# Altium PCB Copy of remote_control_light.PcbDoc
Units mm, origin at the board's own origin, x right, y up, seen from the top; angles counter-clockwise.
Board outline 49.78 x 85.09 mm, 2 copper layers (Top Layer, Bottom Layer); 21 components, 12 nets, 88 pads, 0 vias.
Unrouted connection lines stored in the file: 50.
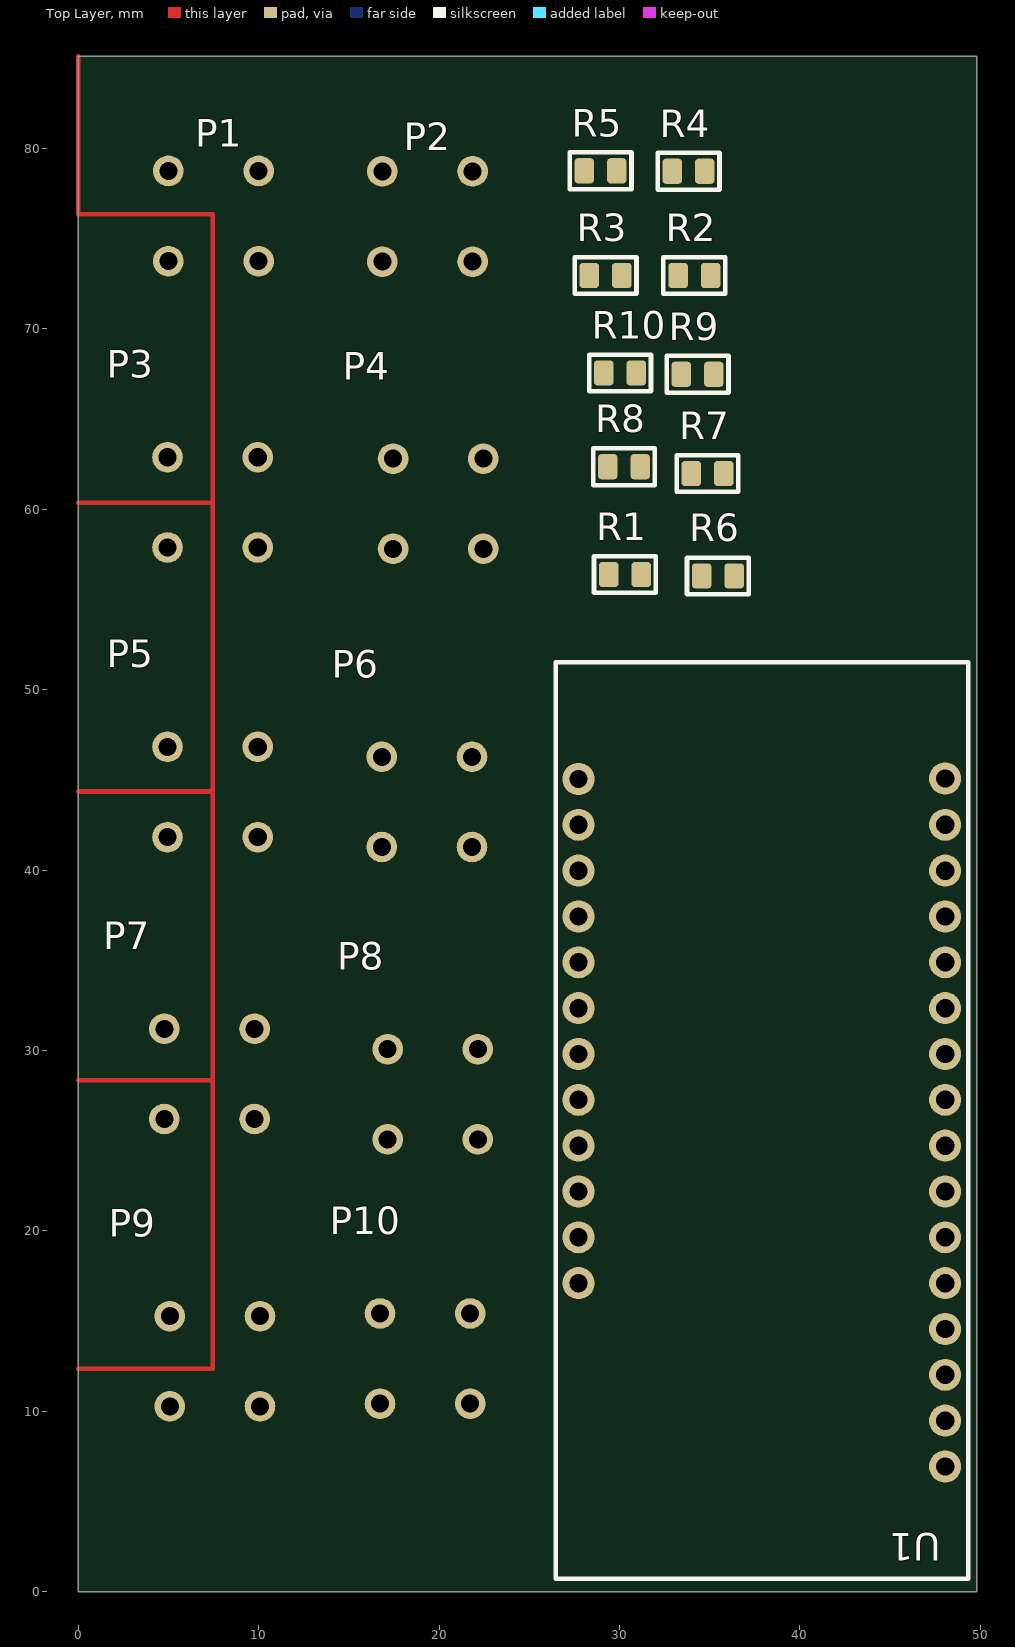
[diagram p0: Top Layer view]
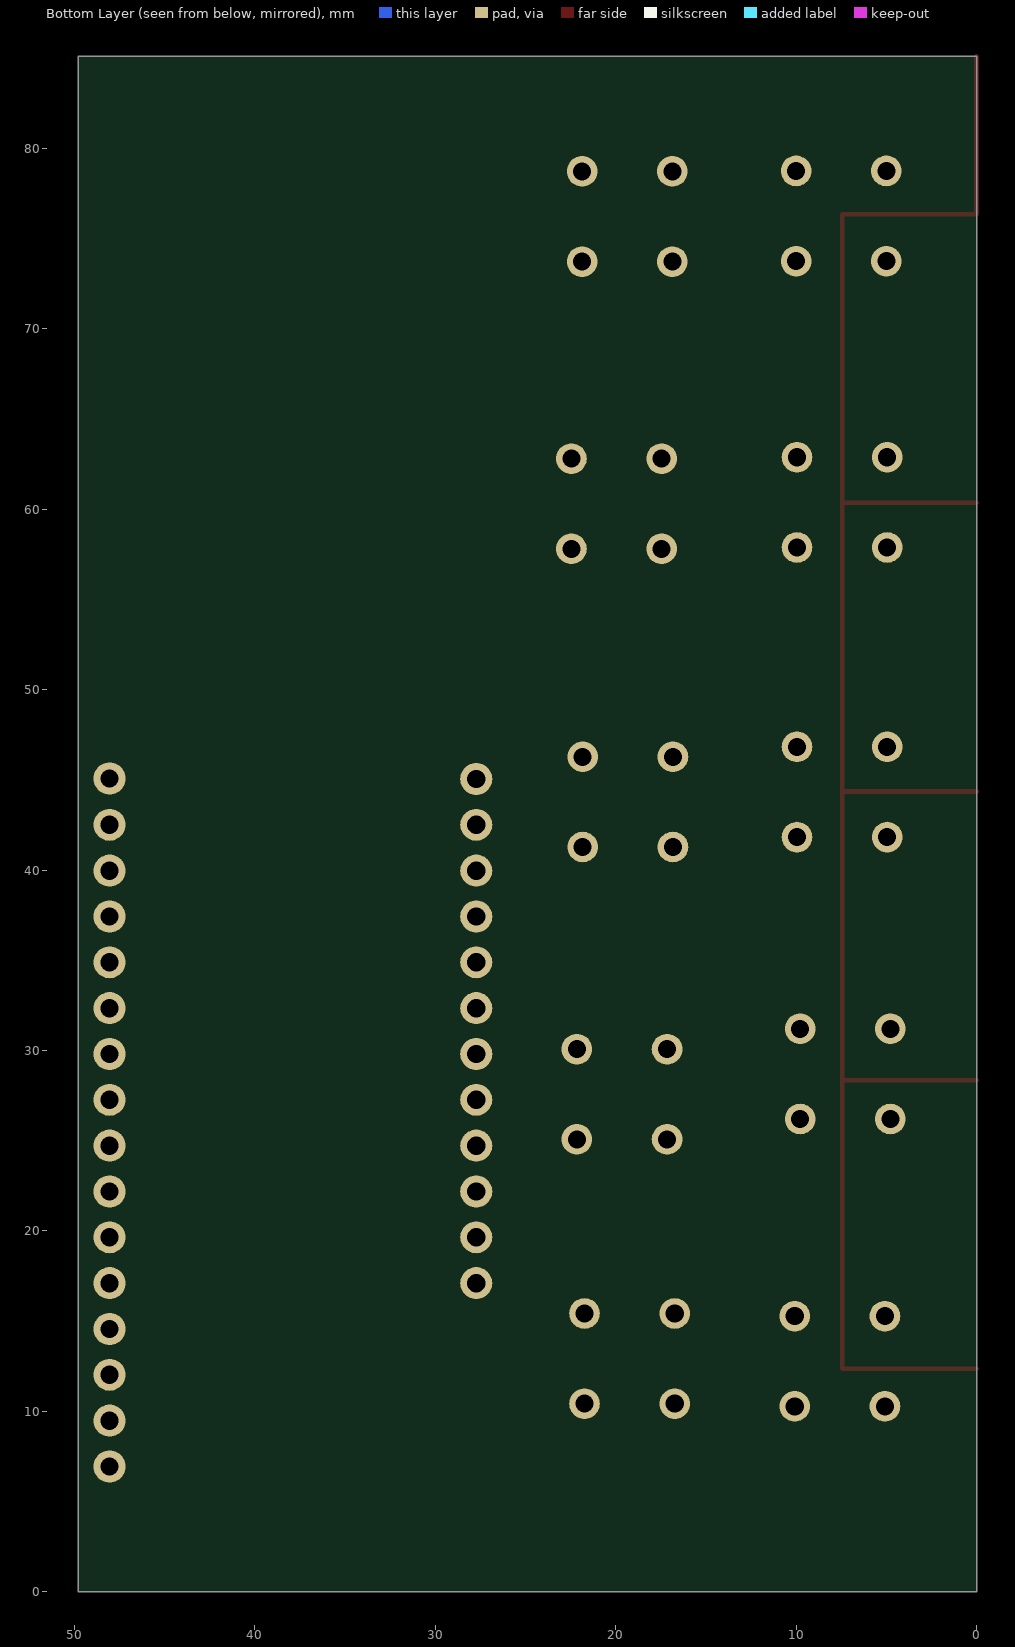
[diagram p1: Bottom Layer view, seen from below]

## Layer stack, top to bottom
Top Solder: solder mask 0.0102, Solder Resist, Dk 3.5
Top Layer: signal copper 0.0356
Dielectric 1: dielectric 0.32, FR-4, Dk 4.8
Bottom Layer: signal copper 0.0356
Bottom Solder: solder mask 0.0102, Solder Resist, Dk 3.5

## Board outline
0,0 0,85.09 49.784,85.09 49.784,0

## Design rules (kind name [scope] priority, off if disabled: settings)
Clearance [All] p1: gap=0.254 ignorepadtopadclearanceinfootprint=FALSE except(0: Arc-Hole Track-Hole SMDPad-Hole THPad-Hole Via-Hole Fill-Hole Poly-Hole Region-Hole Text-Hole)
PolygonConnect [All] p1: connectstyle=Relief reliefconductorwidth=0.254 reliefentries=4 polygonreliefangle="90 Angle" airgapwidth=0.254
RoutingVias [All] p1: holewidth=0.711 width=1.27 viastyle="Through Hole" minholewidth=0.711 minwidth=1.27 maxholewidth=0.711 maxwidth=1.27
SolderMaskExpansion [All] p1: expansion=0.102
Width [All] p1: maxlimit=0.254 minlimit=0.254 preferedwidth=0.254
30 further rules are at their usual default settings.

## Components (designator, comment, footprint, x,y, rotation, side; value= is the part's Value field where it differs from the comment)
P1 "PUSH_BUTTON_D6F" PUSH_BUTTON_D6F 9.999,73.741 r180 top
P2 "PUSH_BUTTON_D6F" PUSH_BUTTON_D6F 16.856,78.716 r0 top
P3 "PUSH_BUTTON_D6F" PUSH_BUTTON_D6F 9.95,57.875 r180 top
P4 "PUSH_BUTTON_D6F" PUSH_BUTTON_D6F 17.45,62.8 r0 top
P5 "PUSH_BUTTON_D6F" PUSH_BUTTON_D6F 9.95,41.825 r180 top
P6 "PUSH_BUTTON_D6F" PUSH_BUTTON_D6F 16.825,46.275 r0 top
P7 "PUSH_BUTTON_D6F" PUSH_BUTTON_D6F 9.775,26.2 r180 top
P8 "PUSH_BUTTON_D6F" PUSH_BUTTON_D6F 17.15,30.075 r0 top
P9 "PUSH_BUTTON_D6F" PUSH_BUTTON_D6F 10.075,10.275 r180 top
P10 "PUSH_BUTTON_D6F" PUSH_BUTTON_D6F 16.725,15.425 r0 top
R1 "RES - 0805" RES_0805 30.3,56.375 r0 top value=1k
R2 "RES - 0805" RES_0805 34.148,72.95 r180 top value=1k
R3 "RES - 0805" RES_0805 29.225,72.95 r0 top value=1k
R4 "RES - 0805" RES_0805 33.825,78.725 r180 top value=1k
R5 "RES - 0805" RES_0805 28.95,78.75 r0 top value=1k
R6 "RES - 0805" RES_0805 35.452,56.3 r0 top value=1k
R7 "RES - 0805" RES_0805 34.875,61.975 r0 top value=1k
R8 "RES - 0805" RES_0805 30.248,62.35 r0 top value=1k
R9 "RES - 0805" RES_0805 34.325,67.475 r180 top value=1k
R10 "RES - 0805" RES_0805 30.027,67.55 r0 top value=1k
U1 "ESP32_FEATHER_ADAFRUIT" ESP32_FEATHER 27.725,6.945 r90 top

## Footprints (in the part's own frame and the unit in brackets; to place one, negate y for a bottom-side part, rotate by r counter-clockwise, add the part's x,y. Pads: shape width x height; smd on the part's side, far side on the other; paste and mask are expansions set on the pad)
ESP32_FEATHER [mil] "ESP32 board"
  round 70 hole 40: 1(1500.98,-800) 2(1400,-800) 3(1300,-800) 4(1200,-800) 5(1100,-800) 6(1000,-800) 7(900,-800) 8(800,-800) 9(700,-800) 10(600,-800) 11(500,-800) 12(400,-800) 13(300,-800) 14(200,-800) 15(100,-800) 16(0,-800) 17(400,0) 18(500,0) 19(600,0) 20(700,0) 21(800,0) 22(900,0) 23(1000,0) 24(1100,0) 25(1200,0) 26(1300,0) 27(1400,0) 28(1500,0)
  silkscreen extent -245,-850 1755,50, body extent -273,-850 1749,50, height 251
PUSH_BUTTON_D6F [mm] "push button d6f"
  round 1.7 hole 1: 1(0,0) 1(5,0) 2(0,-5) 2(5,-5)
  body extent -2.91,-8.48 8.43,3.5, height 5.8
RES_0805 [mil]
  rrect37% 43x55 smd: 1(-35.5,0) 2(35.5,0)
  silkscreen extent -68,-40 68,40, body extent -45,-27 45,27, height 30

## Part data
R1 R2 R3 R4 R5 R6 R7 R8 R9 R10: Package=0805, CreatedBy="Jonathan Bouchard", Precision=1%

## Nets (pads, with @x,y where several pads share a name; then routed paths per layer and width w, separated by ;. In a path a pad name is that pad's centre, name@x,y a point inside that pad or via, vN(x,y) a via of type N, cw(c..) or ccw(c..) an arc to the next point about the centre after c; other vN are vias at no path point)
3V3: P1.1 P2.1 P3.1 P4.1 P5.1 P6.1 P7.1 P8.1 P9.1 P10.1 U1.15
GND: R1.1 R2.1 R3.1 R4.1 R5.1 R6.1 R7.1 R8.1 R9.1 R10.1 U1.13
NetP1_2: P1.2 R5.2
NetP2_2: P2.2 R10.2
NetP3_2: P3.2 R4.2
NetP4_2: P4.2 R9.2
NetP5_2: P5.2 R3.2
NetP6_2: P6.2 R8.2
NetP7_2: P7.2 R2.2
NetP8_2: P8.2 R7.2
NetP9_2: P9.2 R1.2
NetP10_2: P10.2 R6.2
pads on no net: U1.1 U1.2 U1.3 U1.4 U1.5 U1.6 U1.7 U1.8 U1.9 U1.10 U1.11 U1.12 U1.14 U1.16 U1.17 U1.18 U1.19 U1.20 U1.21 U1.22 U1.23 U1.24 U1.25 U1.26 U1.27 U1.28
copper on no net: | length 110
  Top Layer w0.254: 0,12.35 7.45,12.35 7.45,28.35 ; 0,28.35 7.45,28.35 ; 0,44.35 7.45,44.35 ; 0,60.35 7.45,60.35 ; 0,85.1 0,76.35 7.45,76.35 7.45,60.35 ; 7.45,28.35 7.45,44.35 ; 7.45,44.35 7.45,60.35

## Silkscreen, mask and mechanical layers (free items; w line width, h text height)
Mechanical 1:
  lines w0.254: 5.275,1.475 19.975,1.475 19.975,4.25 5.275,4.25 5.275,1.475